# EAGLE board board (EAGLE 9.7.0)
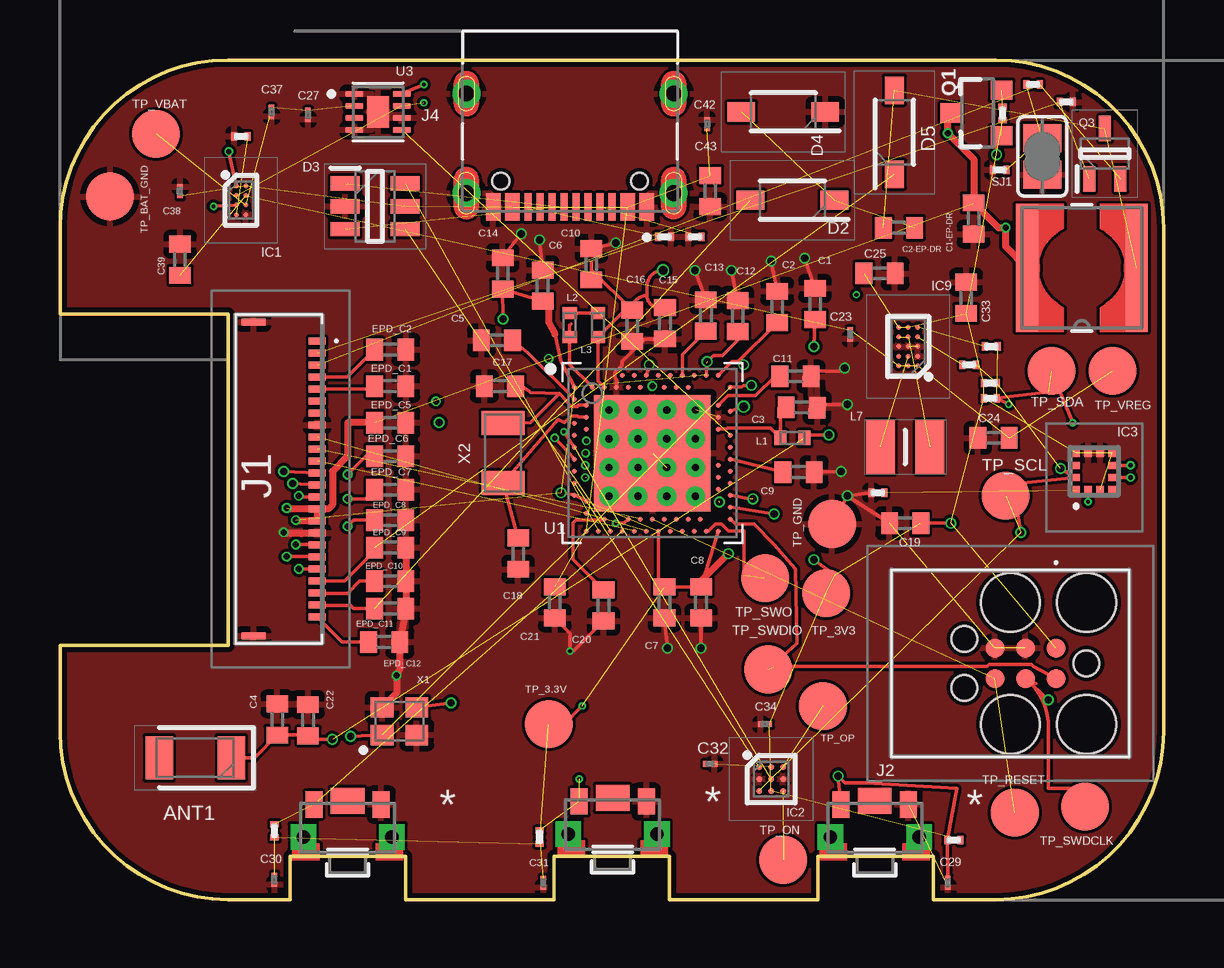
[diagram p0: board, top side]
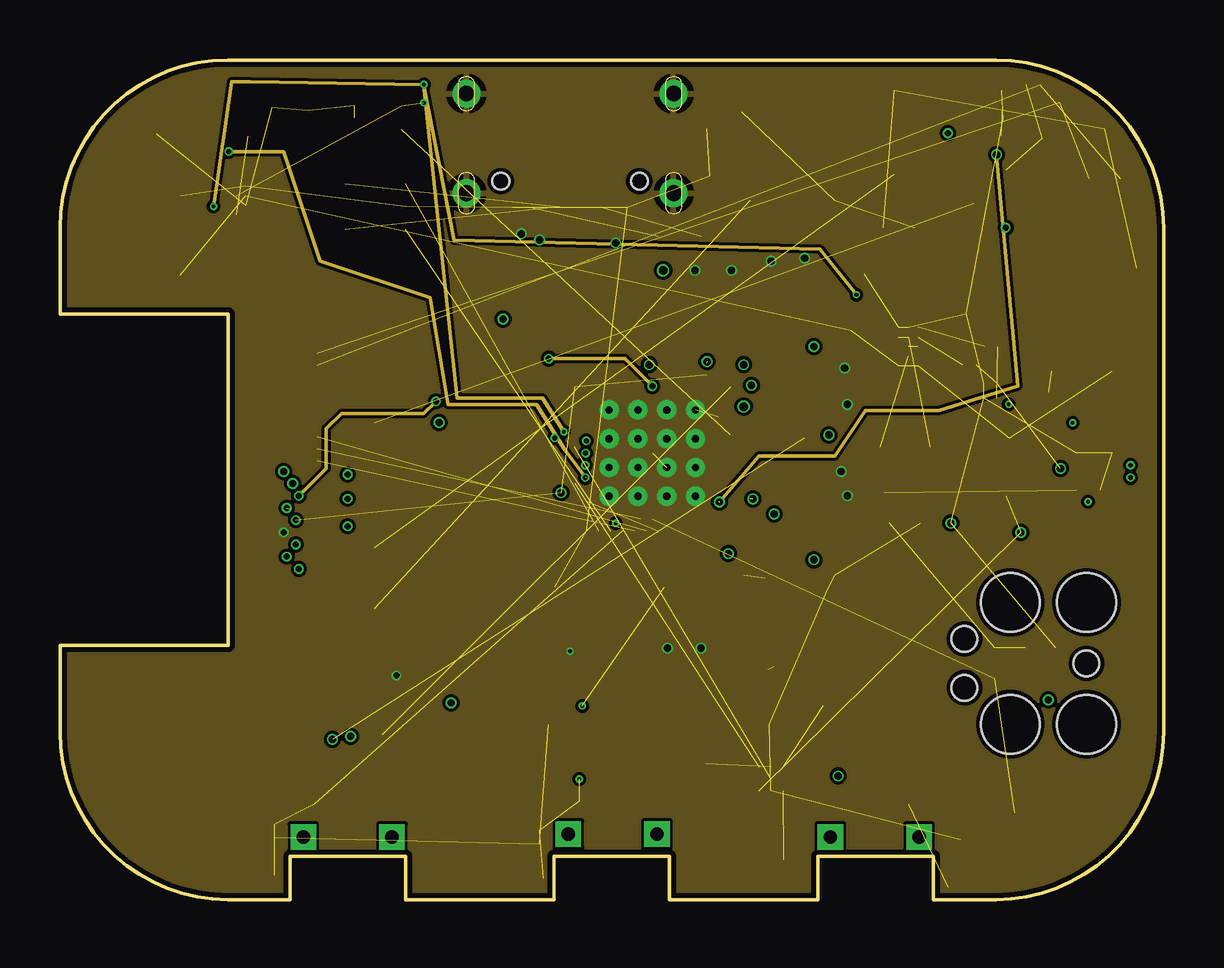
[diagram p1: board, inner layer Route2]
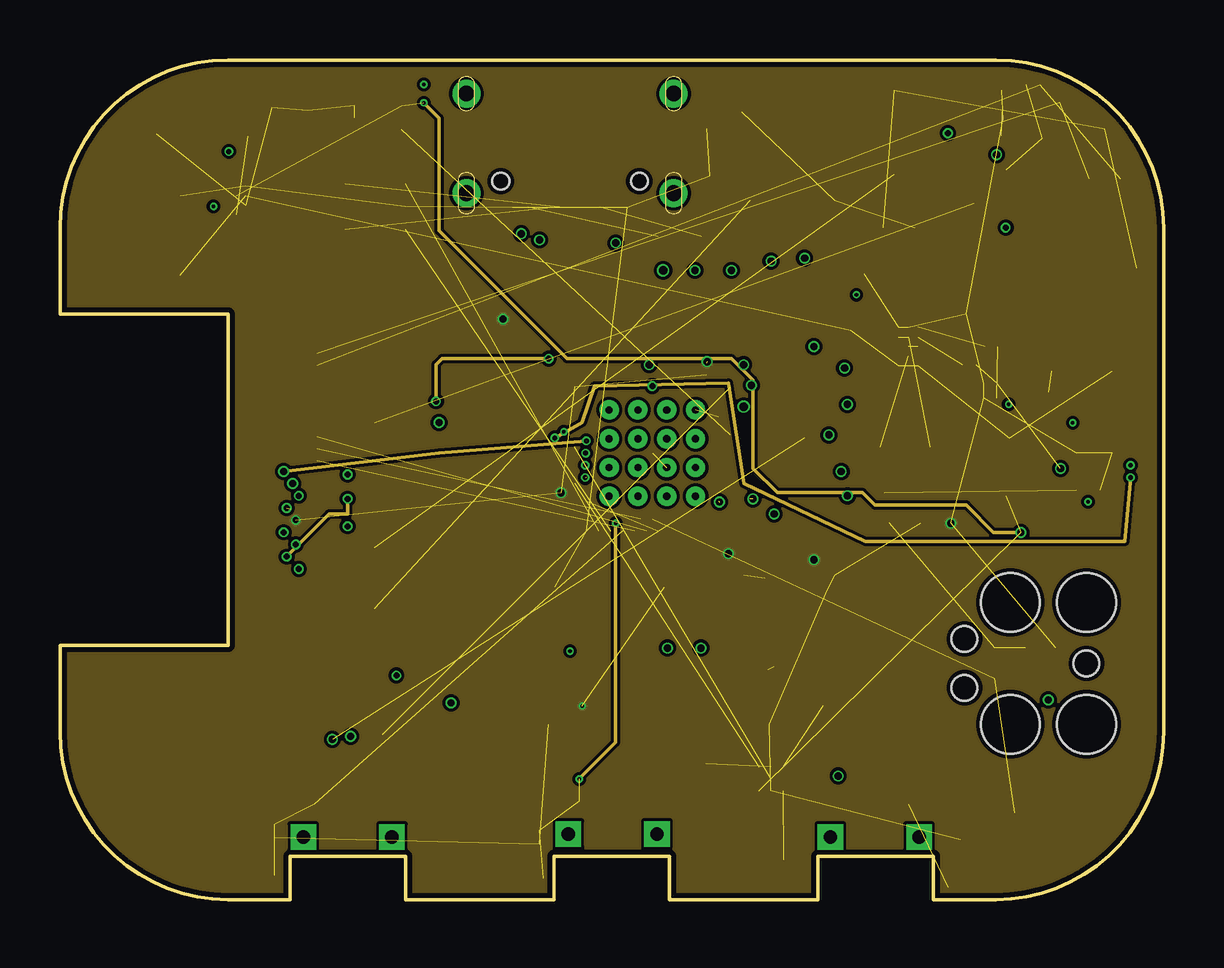
[diagram p2: board, inner layer Route15]
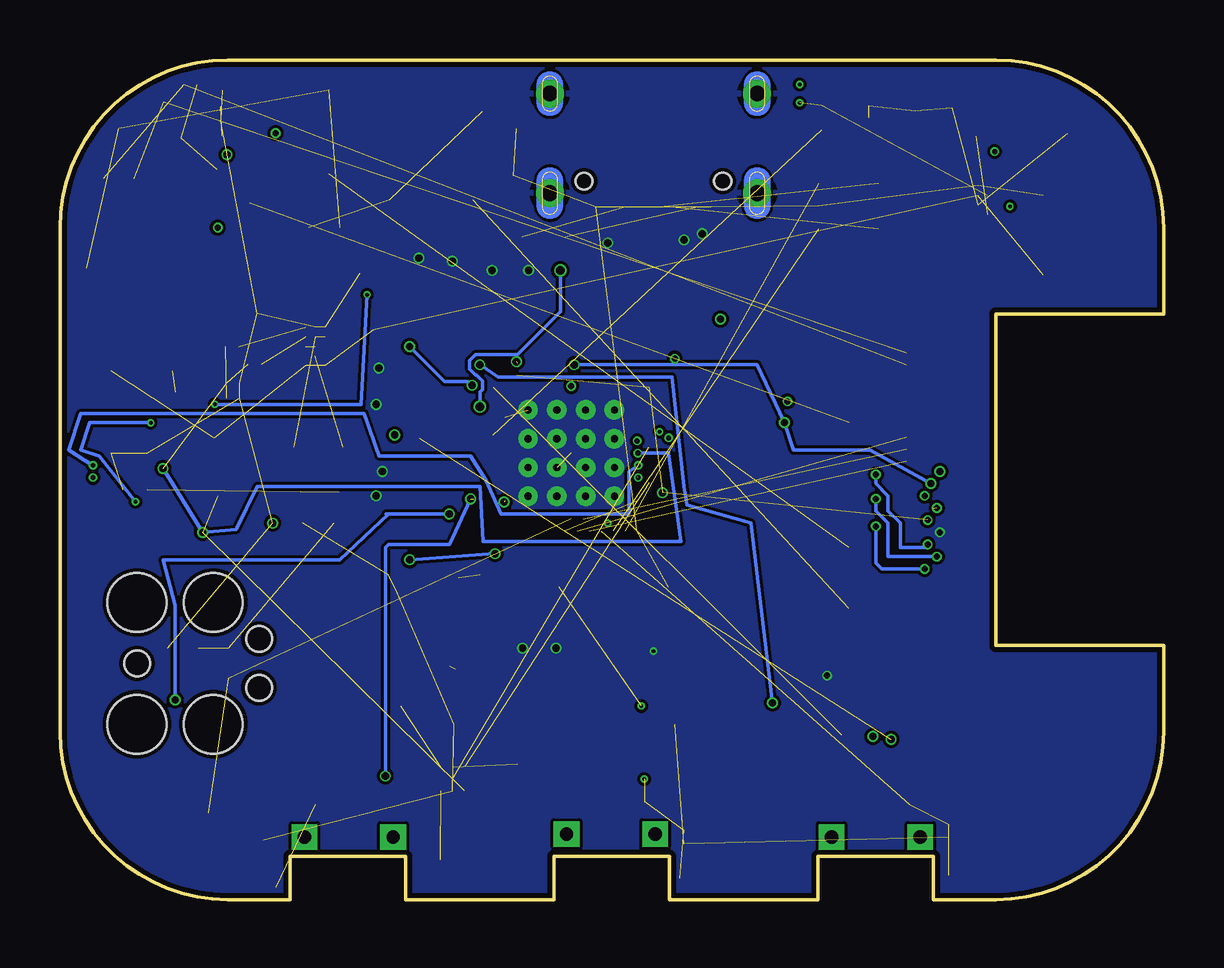
[diagram p3: board, bottom side, seen from below]

Size 46 x 35 mm. Coordinates in mm from the lower left corner, seen from the top.
Outline: 39,0 36.4,0 36.4,1.8 31.6,1.8 31.6,0 25.4,0 25.4,1.8 20.6,1.8 20.6,0 14.4,0 14.4,1.8 9.6,1.8 9.6,0 7,0 arc-90 0,7 0,10.6 7,10.6 7,24.4 0,24.4 0,28 arc-90 7,35 39,35 arc-90 46,28 46,7 arc-90 39,0
Copper layers (1*16): Top 0.035mm / dielectric 1.6mm / Bottom 0.035mm
Design rules "jlcpcb-2layers.dru": minimum track width 5mil, minimum drill 0.3mm, track to track 5mil, track to pad 5mil, pad to pad 5mil, via to via 5mil, smd to smd 5mil, copper to edge 0.2mm, drill to drill 6mil, minimum pad ring 10mil, minimum via ring 3mil, stop-mask expansion 4mil, vias tented up to drill 0mil, thermal gap 10mil

## Footprints (pad centres in the part's own frame; a part is rotated, then mirrored left to right if it is on the bottom)
2450AT18B100E_ANTC3216X140N = smd 1.15 x 1.8: 1 -1.5,0; 2 1.5,0
ESP32_C6_LIBRARY_1_ESP32_WROVER_EAGLE-LTSPICE_C0402 = smd 0.7 x 0.9: 1 -0.65,0; 2 0.65,0
GRM011R60J152KE01L_2_CAPC0201X13N = smd 0.22 x 0.23: 1 -0.185,0; 2 0.185,0
ESP32_C6_LIBRARY_5_SOD3716X135N = smd 1.15 x 0.8: 1 -1.75,0; 2 1.75,0
ESP32_C6_LIBRARY_3_SOT95P280X145-6N = smd 1.2 x 0.6: 1 -1.25,0.95; 2 -1.25,0; 3 -1.25,-0.95; 4 1.25,-0.95; 5 1.25,0; 6 1.25,0.95
BQ25180YBGR_BGA8C40P2X4_100X155X50 = smd 0.2 x 0.2: A1 -0.2,0.6; A2 0.2,0.6; B1 -0.2,0.2; B2 0.2,0.2; C1 -0.2,-0.2; C2 0.2,-0.2; D1 -0.2,-0.6; D2 0.2,-0.6
DRV2605YZFR_BGA9C50P3X3_144X144X62 = smd 0.25 x 0.25: A1 -0.5,0.5; A2 0,0.5; A3 0.5,0.5; B1 -0.5,0; B2 0,0; B3 0.5,0; C1 -0.5,-0.5; C2 0,-0.5; C3 0.5,-0.5
BMA423_BMA423 = smd 0.3 x 0.35: 1 -0.75,-0.775; 2 -0.25,-0.775; 3 0.25,-0.775; 4 0.75,-0.775; 7 0.75,0.775; 8 0.25,0.775; 9 -0.25,0.775; 10 -0.75,0.775 | smd 0.35 x 0.3: 5 0.775,-0.25; 6 0.775,0.25; 11 -0.775,0.25; 12 -0.775,-0.25
RT6160AWSC_BGA15C40P3X5_140X230X60 = smd 0.216 x 0.216: A1 -0.4,0.8; A2 0,0.8; A3 0.4,0.8; B1 -0.4,0.4; B2 0,0.4; B3 0.4,0.4; C1 -0.4,0; C2 0,0; C3 0.4,0; D1 -0.4,-0.4; D2 0,-0.4; D3 0.4,-0.4; E1 -0.4,-0.8; E2 0,-0.8; E3 0.4,-0.8
503480-2400_5034802400 = smd 0.3 x 0.7: 1 -5.75,1.525; 2 -5.25,1.525; 3 -4.75,1.525; 4 -4.25,1.525; 5 -3.75,1.525; 6 -3.25,1.525; 7 -2.75,1.525; 8 -2.25,1.525; 9 -1.75,1.525; 10 -1.25,1.525; 11 -0.75,1.525; 12 -0.25,1.525; 13 0.25,1.525; 14 0.75,1.525; 15 1.25,1.525; 16 1.75,1.525; 17 2.25,1.525; 18 2.75,1.525; 19 3.25,1.525; 20 3.75,1.525; 21 4.25,1.525; 22 4.75,1.525; 23 5.25,1.525; 24 5.75,1.525 | smd 0.3 x 1: MP1 -6.54,-1.125; MP2 6.54,-1.125
TC2030-IDC_TC2030IDC = smd 0.783 x 0.783: 1 -0.953,-0.635; 2 -0.953,0.635; 3 0.317,-0.635; 4 0.317,0.635; 5 1.588,-0.635; 6 1.588,0.635 | hole 2.451: -2.223,-2.54; -2.223,2.54; 0.952,-2.54; 0.952,2.54 | hole 1.067: -2.223,0; 2.857,-1.016; 2.857,1.016
KH-TYPE-C-16P_KINGHELM_KH-TYPE-C-16P = smd 0.6 x 1.15: A1_B12 -3.2,4.725; A4_B9 -2.4,4.725; A9_B4 2.4,4.725; A12_B1 3.2,4.725 | smd 0.3 x 1.15: A5 -1.25,4.725; A6 -0.25,4.725; A7 0.25,4.725; A8 1.25,4.725; B5 1.75,4.725; B6 0.75,4.725; B7 -0.75,4.725; B8 -1.75,4.725 | drill 0.65 pad 1.05: SH1 -4.32,0; SH2 4.32,0; SH3 -4.32,4.15; SH4 4.32,4.15 | hole 0.7: -2.89,3.65; 2.89,3.65
NORDIC_NRF_2_RESC0402_L = smd 0.5 x 0.6: 1 -0.5,0; 2 0.5,0
ESP32_C6_LIBRARY_2_IND_4828-WE-TPC_WRE = smd 0.9 x 5.3: 1 -2.286,0; 2 2.286,0
MLP2016SR47MT0S1_INDC2016X100N = smd 1.2 x 2.2: 1 -1.028,0; 2 1.028,0
ESP32_C6_LIBRARY_4_ESP32_C6_LIBRARY_4_ESP32_C6_LIBRARY_4_ESP32_C6_LIBRARY_4_ESP32_WROVER_SPARKFUN-DISCRETESEMI_SOT23-3 = smd 0.8 x 0.9: 1 -0.95,-1; 2 0.95,-1; 3 0,1.1
ESP32_C6_LIBRARY_6_SOT65P210X110-3N = smd 1.05 x 0.5: 1 -1.05,0.65; 2 -1.05,-0.65; 3 1.05,0
ERA-1AEB3401C_0201 = smd 0.35 x 0.25: 1 0,0.275; 2 0,-0.275
ESP32_C6_LIBRARY_7_JUMPER_SJ = smd 1.168 x 1.6: 1 -0.762,0; 2 0.762,0
2025-10-22_07-23-44_LIBRARY_SW_EVP-AKE31A_PAN = smd 0.711 x 1.092: 1 -1.4,-0.972; 2 1.4,-0.972 | drill 0.559 pad 0.914 square: 3 -1.848,0.381; 4 1.848,0.381 | smd 1.397 x 1.092: 5 0,-1.124
HECTOR_WATCH_1_TP20R = smd 2 x 2: TP 0,0
NORDIC_NRF_4_AQFN50P700X700X85_HS-74N = smd 4.85 x 4.85: P$74 0,0 | drill 0.3 pad 0.6: P$75 -1.8,1.8; P$76 -0.6,1.8; P$77 0.6,1.8; P$78 1.8,1.8; P$79 -1.8,0.6; P$80 -0.6,0.6; P$81 0.6,0.6; P$82 1.8,0.6; P$83 -1.8,-0.6; P$84 -0.6,-0.6; P$85 0.6,-0.6; P$86 1.8,-0.6; P$87 -1.8,-1.8; P$88 -0.6,-1.8; P$89 0.6,-1.8; P$90 1.8,-1.8 | smd 0.2 x 0.2: P$A8 -1.25,3.25; P$A10 -0.75,3.25; P$A12 -0.25,3.25; P$A14 0.25,3.25; P$A16 0.75,3.25; P$A18 1.25,3.25; P$A20 1.75,3.25; P$A22 2.25,3.25; P$A23 2.75,3.25; P$AA24 3.25,-2.25; P$AB2 -2.75,-2.5; P$AC5 -2,-2.75; P$AC9 -1,-2.75; P$AC11 -0.5,-2.75; P$AC13 0,-2.75; P$AC15 0.5,-2.75; P$AC17 1,-2.75; P$AC19 1.5,-2.75; P$AC21 2,-2.75; P$AC24 3.25,-2.75; P$AD2 -2.75,-3.25; P$AD4 -2.25,-3.25; P$AD6 -1.75,-3.25; P$AD8 -1.25,-3.25; P$AD10 -0.75,-3.25; P$AD12 -0.25,-3.25; P$AD14 0.25,-3.25; P$AD16 0.75,-3.25; P$AD18 1.25,-3.25; P$AD20 1.75,-3.25; P$AD22 2.25,-3.25; P$AD23 2.75,-3.25; P$B1 -3.25,2.75; P$B3 -2.5,2.75; P$B5 -2,2.75; P$B7 -1.5,2.75; P$B9 -1,2.75; P$B11 -0.5,2.75; P$B13 0,2.75; P$B15 0.5,2.75; P$B17 1,2.75; P$B19 1.5,2.75; P$B24 3.25,2.75; P$C1 -3.25,2.25; P$D2 -2.75,2; P$D23 2.75,2; P$E24 3.25,1.75; P$F2 -2.75,1.5; P$F23 2.75,1.5; P$G1 -3.25,1.25; P$H2 -2.75,1; P$H23 2.75,1; P$J1 -3.25,0.75; P$J24 3.25,0.75; P$K2 -2.75,0.5; P$L1 -3.25,0.25; P$L24 3.25,0.25; P$M2 -2.75,0; P$N1 -3.25,-0.25; P$N24 3.25,-0.25; P$P2 -2.75,-0.5; P$P23 2.75,-0.5; P$R1 -3.25,-0.75; P$R24 3.25,-0.75; P$T2 -2.75,-1; P$T23 2.75,-1; P$U1 -3.25,-1.25; P$U24 3.25,-1.25; P$V23 2.75,-1.5; P$W1 -3.25,-1.75; P$W24 3.25,-1.75; P$Y2 -2.75,-2; P$Y23 2.75,-2
ESP32_C6_LIBRARY_SON50P200X200X80-9N = smd 0.76 x 0.27: 1 -0.985,0.75; 2 -0.985,0.25; 3 -0.985,-0.25; 4 -0.985,-0.75; 5 0.985,-0.75; 6 0.985,-0.25; 7 0.985,0.25; 8 0.985,0.75 | smd 0.9 x 1.3: 9 0,0
NORDIC_NRF_BT-XTAL_2016_N = smd 0.95 x 0.85: 1 -0.725,-0.575; 2 0.725,-0.575; 3 0.725,0.575; 4 -0.725,0.575
NORDIC_NRF_1_XTAL_3215_N = smd 1 x 1.8: 1 -1.25,0; 2 1.25,0

## Placement (x,y rotation side)
ANT1  2450AT18B100E  [2450AT18B100E_ANTC3216X140N]  5.64,5.91 180 top
C1  12pF  [ESP32_C6_LIBRARY_1_ESP32_WROVER_EAGLE-LTSPICE_C0402]  31.47,24.83 270 top
C1-EP-DR  10uF  [ESP32_C6_LIBRARY_1_ESP32_WROVER_EAGLE-LTSPICE_C0402]  38.09,28.39 90 top
C2  12pF  [ESP32_C6_LIBRARY_1_ESP32_WROVER_EAGLE-LTSPICE_C0402]  29.9,24.71 90 top
C2-EP-DR  4.7uF/25V  [ESP32_C6_LIBRARY_1_ESP32_WROVER_EAGLE-LTSPICE_C0402]  34.98,28.01 0 top
C3  1pF  [ESP32_C6_LIBRARY_1_ESP32_WROVER_EAGLE-LTSPICE_C0402]  30.91,20.52 179.1 top
C4  1pF  [ESP32_C6_LIBRARY_1_ESP32_WROVER_EAGLE-LTSPICE_C0402]  9.06,7.51 270 top
C5  100nF  [ESP32_C6_LIBRARY_1_ESP32_WROVER_EAGLE-LTSPICE_C0402]  18.21,23.31 0 top
C6  4.7uF  [ESP32_C6_LIBRARY_1_ESP32_WROVER_EAGLE-LTSPICE_C0402]  20.12,25.59 270 top
C7  100nF  [ESP32_C6_LIBRARY_1_ESP32_WROVER_EAGLE-LTSPICE_C0402]  25.2,12.39 90 top
C8  100nF  [ESP32_C6_LIBRARY_1_ESP32_WROVER_EAGLE-LTSPICE_C0402]  26.72,12.39 90 top
C9  820pF  [ESP32_C6_LIBRARY_1_ESP32_WROVER_EAGLE-LTSPICE_C0402]  30.79,17.82 180 top
C10  N.C.  [ESP32_C6_LIBRARY_1_ESP32_WROVER_EAGLE-LTSPICE_C0402]  22.15,26.48 270 top
C11  100pF  [ESP32_C6_LIBRARY_1_ESP32_WROVER_EAGLE-LTSPICE_C0402]  30.66,21.81 179.8 top
C12  100nF  [ESP32_C6_LIBRARY_1_ESP32_WROVER_EAGLE-LTSPICE_C0402]  28.25,24.32 90 top
C13  N.C.  [ESP32_C6_LIBRARY_1_ESP32_WROVER_EAGLE-LTSPICE_C0402]  26.92,24.35 90 top
C14  4.7uF  [ESP32_C6_LIBRARY_1_ESP32_WROVER_EAGLE-LTSPICE_C0402]  18.46,26.1 270 top
C15  1.0uF  [ESP32_C6_LIBRARY_1_ESP32_WROVER_EAGLE-LTSPICE_C0402]  25.22,24.02 270 top
C16  47nF  [ESP32_C6_LIBRARY_1_ESP32_WROVER_EAGLE-LTSPICE_C0402]  23.85,23.92 270 top
C17  12pF  [ESP32_C6_LIBRARY_1_ESP32_WROVER_EAGLE-LTSPICE_C0402]  18.34,21.4 180 top
C18  12pF  [ESP32_C6_LIBRARY_1_ESP32_WROVER_EAGLE-LTSPICE_C0402]  19.1,14.42 270 top
C19  100nF  [ESP32_C6_LIBRARY_1_ESP32_WROVER_EAGLE-LTSPICE_C0402]  35.23,15.69 180 top
C20  4.7uF  [ESP32_C6_LIBRARY_1_ESP32_WROVER_EAGLE-LTSPICE_C0402]  22.66,12.26 90 top
C21  4.7uF  [ESP32_C6_LIBRARY_1_ESP32_WROVER_EAGLE-LTSPICE_C0402]  20.63,12.39 90 top
C22  N.C.  [ESP32_C6_LIBRARY_1_ESP32_WROVER_EAGLE-LTSPICE_C0402]  10.34,7.48 270 top
C23  0.1uF  [GRM011R60J152KE01L_2_CAPC0201X13N]  32.95,23.56 270 top
C24  10uF  [ESP32_C6_LIBRARY_1_ESP32_WROVER_EAGLE-LTSPICE_C0402]  38.91,19.25 0 top
C25  22uF  [ESP32_C6_LIBRARY_1_ESP32_WROVER_EAGLE-LTSPICE_C0402]  34.16,26.1 0 top
C27  0.1uF  [GRM011R60J152KE01L_2_CAPC0201X13N]  10.34,32.71 90 top
C29  1uF  [GRM011R60J152KE01L_2_CAPC0201X13N]  37.01,0.7 270 top
C30  1uF  [GRM011R60J152KE01L_2_CAPC0201X13N]  8.94,0.83 270 top
C31  1uF  [GRM011R60J152KE01L_2_CAPC0201X13N]  20.16,0.7 270 top
C32  1uF  [GRM011R60J152KE01L_2_CAPC0201X13N]  27.1,5.66 0 top
C33  22uF  [ESP32_C6_LIBRARY_1_ESP32_WROVER_EAGLE-LTSPICE_C0402]  37.77,25.09 90 top
C34  0.1uF  [GRM011R60J152KE01L_2_CAPC0201X13N]  29.39,7.31 0 top
C37  1uF  [GRM011R60J152KE01L_2_CAPC0201X13N]  8.82,32.83 90 top
C38  1uF  [GRM011R60J152KE01L_2_CAPC0201X13N]  5.01,29.53 270 top
C39  10uF  [ESP32_C6_LIBRARY_1_ESP32_WROVER_EAGLE-LTSPICE_C0402]  5.01,26.67 90 top
C42  0.1uF  [GRM011R60J152KE01L_2_CAPC0201X13N]  26.98,32.33 90 top
C43  4.7uF  [ESP32_C6_LIBRARY_1_ESP32_WROVER_EAGLE-LTSPICE_C0402]  27.1,29.53 90 top
D2  MBR0530  [ESP32_C6_LIBRARY_5_SOD3716X135N]  30.53,29.15 180 top
D3  USBLC6-2SC6Y  [ESP32_C6_LIBRARY_3_SOT95P280X145-6N]  13.13,28.9 0 top
D4  MBR0530  [ESP32_C6_LIBRARY_5_SOD3716X135N]  30.15,32.83 180 top
D5  MBR0530  [ESP32_C6_LIBRARY_5_SOD3716X135N]  34.78,31.98 90 top
EPD_C1  1uF/50V  [ESP32_C6_LIBRARY_1_ESP32_WROVER_EAGLE-LTSPICE_C0402]  13.77,21.4 180 top
EPD_C2  1uF/50V  [ESP32_C6_LIBRARY_1_ESP32_WROVER_EAGLE-LTSPICE_C0402]  13.77,22.93 180 top
EPD_C5  0.1uF/50V  [ESP32_C6_LIBRARY_1_ESP32_WROVER_EAGLE-LTSPICE_C0402]  13.77,19.88 180 top
EPD_C6  1uF/50V  [ESP32_C6_LIBRARY_1_ESP32_WROVER_EAGLE-LTSPICE_C0402]  13.77,18.48 180 top
EPD_C7  1uF/50V  [ESP32_C6_LIBRARY_1_ESP32_WROVER_EAGLE-LTSPICE_C0402]  13.77,17.09 180 top
EPD_C8  1uF/50V  [ESP32_C6_LIBRARY_1_ESP32_WROVER_EAGLE-LTSPICE_C0402]  13.77,15.82 180 top
EPD_C9  1uF/50V  [ESP32_C6_LIBRARY_1_ESP32_WROVER_EAGLE-LTSPICE_C0402]  13.77,14.67 180 top
EPD_C10  1uF/50V  [ESP32_C6_LIBRARY_1_ESP32_WROVER_EAGLE-LTSPICE_C0402]  13.77,13.28 180 top
EPD_C11  1uF/50V  [ESP32_C6_LIBRARY_1_ESP32_WROVER_EAGLE-LTSPICE_C0402]  13.77,12.13 180 top
EPD_C12  1uF/50V  [ESP32_C6_LIBRARY_1_ESP32_WROVER_EAGLE-LTSPICE_C0402]  13.51,10.74 180 top
IC1  BQ25180YBGR  [BQ25180YBGR_BGA8C40P2X4_100X155X50]  7.55,29.15 0 top
IC2  DRV2605YZFR  [DRV2605YZFR_BGA9C50P3X3_144X144X62]  29.64,5.02 0 top
IC3  BMA421  [BMA423_BMA423]  43.11,17.85 0 top
IC9  RT6160AWSC  [RT6160AWSC_BGA15C40P3X5_140X230X60]  35.36,23.05 180 top
J1  503480-2400  [503480-2400_5034802400]  9.2,17.53 270 top
J2  TC2030-IDC  [TC2030-IDC_TC2030IDC]  40.56,9.85 180 top
J4  KH-TYPE-C-16P  [KH-TYPE-C-16P_KINGHELM_KH-TYPE-C-16P]  21.26,33.6 180 top
L1  3.9nH  [NORDIC_NRF_2_RESC0402_L]  30.53,19.25 180 top
L2  10uH  [NORDIC_NRF_2_RESC0402_L]  21.25,23.94 270 top
L3  15nH  [NORDIC_NRF_2_RESC0402_L]  22.43,23.94 90 top
L5  68uH  [ESP32_C6_LIBRARY_2_IND_4828-WE-TPC_WRE]  42.6,26.33 180 top
L7  FTC252012SR47MBCA  [MLP2016SR47MT0S1_INDC2016X100N]  35.23,18.86 0 top
Q1  DMG2305UX-7  [ESP32_C6_LIBRARY_4_ESP32_C6_LIBRARY_4_ESP32_C6_LIBRARY_4_ESP32_C6_LIBRARY_4_ESP32_WROVER_SPARKFUN-DISCRETESEMI_SOT23-3]  38.25,32.79 90 top
Q3  SI1308EDL-T1-GE3  [ESP32_C6_LIBRARY_6_SOT65P210X110-3N]  43.55,31.09 90 top
R1_EP_DR  0.47  [ERA-1AEB3401C_0201]  40.56,33.98 90 top
R1_USB  5K1  [ERA-1AEB3401C_0201]  26.47,27.63 90 top
R2  0  [ERA-1AEB3401C_0201]  38.82,23.05 270 top
R2_EP_DR  10K  [ERA-1AEB3401C_0201]  41.95,33.25 270 top
R2_USB1  5K1  [ERA-1AEB3401C_0201]  25.2,27.63 90 top
R3  0  [ERA-1AEB3401C_0201]  34.09,16.96 90 top
R4  0  [ERA-1AEB3401C_0201]  37.9,22.29 270 top
R5  10K  [ERA-1AEB3401C_0201]  8.94,2.86 0 top
R7  10K  [ERA-1AEB3401C_0201]  37.26,2.48 90 top
R8  10K  [ERA-1AEB3401C_0201]  19.99,2.61 0 top
R9  10K  [ERA-1AEB3401C_0201]  7.55,31.82 90 top
R17  3K3  [ERA-1AEB3401C_0201]  38.79,21.53 90 top
R18  3K3  [ERA-1AEB3401C_0201]  38.79,20.9 90 top
R_PWR_EPD  10K  [ERA-1AEB3401C_0201]  39.3,32.77 0 top
R_TYPE_SEL  2.2  [ERA-1AEB3401C_0201]  39.17,30.42 90 top
SJ1  [ESP32_C6_LIBRARY_7_JUMPER_SJ]  40.95,30.98 90 top
SW_DN  2025-10-22_07-23-44_LIBRARY_EVP-AKE31ASW_EVP-AKE31A_PAN  [2025-10-22_07-23-44_LIBRARY_SW_EVP-AKE31A_PAN]  33.96,2.99 180 top
SW_ENT  2025-10-22_07-23-44_LIBRARY_EVP-AKE31ASW_EVP-AKE31A_PAN  [2025-10-22_07-23-44_LIBRARY_SW_EVP-AKE31A_PAN]  23.04,3.12 180 top
SW_UP  2025-10-22_07-23-44_LIBRARY_EVP-AKE31ASW_EVP-AKE31A_PAN  [2025-10-22_07-23-44_LIBRARY_SW_EVP-AKE31A_PAN]  11.99,2.99 180 top
TP_3.3V  HECTOR_WATCH_1_TPTP20R  [HECTOR_WATCH_1_TP20R]  20.37,7.31 0 top
TP_3V3  HECTOR_WATCH_1_TPTP20R  [HECTOR_WATCH_1_TP20R]  31.93,12.77 0 top
TP_BAT_GND  HECTOR_WATCH_1_TPTP20R  [HECTOR_WATCH_1_TP20R]  2.08,29.31 0 top
TP_GND  HECTOR_WATCH_1_TPTP20R  [HECTOR_WATCH_1_TP20R]  32.18,15.66 0 top
TP_ON  HECTOR_WATCH_1_TPTP20R  [HECTOR_WATCH_1_TP20R]  30.15,1.66 0 top
TP_OP  HECTOR_WATCH_1_TPTP20R  [HECTOR_WATCH_1_TP20R]  31.8,8.07 0 top
TP_RESET  HECTOR_WATCH_1_TPTP20R  [HECTOR_WATCH_1_TP20R]  39.8,3.62 0 top
TP_SCL  HECTOR_WATCH_1_TPTP20R  [HECTOR_WATCH_1_TP20R]  39.42,16.83 0 top
TP_SDA  HECTOR_WATCH_1_TPTP20R  [HECTOR_WATCH_1_TP20R]  41.33,22.04 0 top
TP_SWDCLK  HECTOR_WATCH_1_TPTP20R  [HECTOR_WATCH_1_TP20R]  42.72,3.88 0 top
TP_SWDIO  HECTOR_WATCH_1_TPTP20R  [HECTOR_WATCH_1_TP20R]  29.52,9.59 0 top
TP_SWO  HECTOR_WATCH_1_TPTP20R  [HECTOR_WATCH_1_TP20R]  29.39,13.4 0 top
TP_VBAT  HECTOR_WATCH_1_TPTP20R  [HECTOR_WATCH_1_TP20R]  4,31.92 0 top
TP_VREG  HECTOR_WATCH_1_TPTP20R  [HECTOR_WATCH_1_TP20R]  43.87,22.04 0 top
U1  NRF52840_QF  [NORDIC_NRF_4_AQFN50P700X700X85_HS-74N]  24.69,18.61 0 top
U3  MAX17048G+T10  [ESP32_C6_LIBRARY_SON50P200X200X80-9N]  13.26,32.83 0 top
X1  32MHz  [NORDIC_NRF_BT-XTAL_2016_N]  14.15,7.43 0 top
X2  32.768kHz  [NORDIC_NRF_1_XTAL_3215_N]  18.47,18.61 270 top

## Library data of the parts
ANT1 = InkTime_v5; ARROW_PART_NUMBER: 2450AT18B100E; ARROW_PRICE-STOCK: https://www.arrow.com/en/products/2450at18b100e/johanson-dielectrics?utm_currency=USD&region=nac; DESCRIPTION: Antennas 2.45GHz ANTENNA; HEIGHT: 1.4mm; MANUFACTURER_NAME: JOHANSON TECHNOLOGY; MANUFACTURER_PART_NUMBER: 2450AT18B100E; MOUSER_PART_NUMBER: 609-2450AT18B100E; MOUSER_PRICE-STOCK: https://www.mouser.co.uk/ProductDetail/Johanson-Technology/2450AT18B100E?qs=yCnrNFeXz%252Bh5MFsFIXGZGA%3D%3D
C1 C1-EP-DR C2 C2-EP-DR C3-C22 C24 C25 C33 C39 C43 EPD_C1 EPD_C2 EPD_C5-EPD_C12 = InkTime_v5; SPICEMODEL: NONE; SPICEPREFIX: C
C23 C27 C29-C32 C34 C37 C38 C42 = InkTime_v5; AVAILABILITY: In Stock; CHECK_PRICES: https://www.snapeda.com/parts/GRM011R60J152KE01L/Murata/view-part/?ref=eda; DESCRIPTION: SMD Capacitor X5R(EIA) with Capacitance: 1500pF Tol. 10%. Rated Voltage: 6.3Vdc; MF: Murata; MP: GRM011R60J152KE01L; PACKAGE: 0201 Murata; PRICE: None; SNAPEDA_LINK: https://www.snapeda.com/parts/GRM011R60J152KE01L/Murata/view-part/?ref=snap
D2 D4 D5 = InkTime_v5; AVAILABILITY: In Stock; CHECK_PRICES: https://www.snapeda.com/parts/MBR0530/Onsemi/view-part/?ref=eda; DESCRIPTION: Diode Schottky 30 V 500mA Surface Mount SOD-123; MF: ON Semiconductor; MP: MBR0530; PACKAGE: SOD-123-2 ON Semiconductor; PRICE: None; PURCHASE-URL: https://www.snapeda.com/api/url_track_click_mouser/?unipart_id=179458&manufacturer=ON Semiconductor&part_name=MBR0530&search_term=None; SNAPEDA_LINK: https://www.snapeda.com/parts/MBR0530/Onsemi/view-part/?ref=snap
D3 = InkTime_v5; AVAILABILITY: In Stock; CHECK_PRICES: https://www.snapeda.com/parts/USBLC6-2SC6Y/STMicroelectronics/view-part/?ref=eda; DESCRIPTION: 17V Clamp 5A (8/20µs) Ipp Tvs Diode Surface Mount SOT-23-6; MF: STMicroelectronics; MP: USBLC6-2SC6Y; PACKAGE: SOT-23-6 STMicroelectronics; PRICE: None; SNAPEDA_LINK: https://www.snapeda.com/parts/USBLC6-2SC6Y/STMicroelectronics/view-part/?ref=snap
IC1 = InkTime_v5; ARROW_PART_NUMBER: BQ25180YBGR; ARROW_PRICE-STOCK: https://www.arrow.com/en/products/bq25180ybgr/texas-instruments?utm_currency=USD&region=nac; DESCRIPTION: Charger IC Lithium Ion/Polymer, Lithium Iron Phosphate 8-DSBGA (1.6x1.1); HEIGHT: 0.5mm; MANUFACTURER_NAME: Texas Instruments; MANUFACTURER_PART_NUMBER: BQ25180YBGR; MOUSER_PART_NUMBER: 595-BQ25180YBGR; MOUSER_PRICE-STOCK: https://www.mouser.co.uk/ProductDetail/Texas-Instruments/BQ25180YBGR?qs=doiCPypUmgEWjAK%252BJAX6Tw%3D%3D
IC2 = InkTime_v5; ARROW_PART_NUMBER: DRV2605YZFR; ARROW_PRICE-STOCK: https://www.arrow.com/en/products/drv2605yzfr/texas-instruments?region=nac; DESCRIPTION: Haptic Driver for ERM/LRA with Built-In Library and Smart Loop Architecture; HEIGHT: 0.625mm; MANUFACTURER_NAME: Texas Instruments; MANUFACTURER_PART_NUMBER: DRV2605YZFR
IC3 = InkTime_v5; ARROW_PART_NUMBER: BMA423; ARROW_PRICE-STOCK: https://www.arrow.com/en/products/bma423/bosch; DESCRIPTION: Accelerometers Triaxial low-g 12bit Acceleration Sensor; HEIGHT: 1mm; MANUFACTURER_NAME: BOSCH; MANUFACTURER_PART_NUMBER: BMA423; MOUSER_PART_NUMBER: 262-BMA423; MOUSER_PRICE-STOCK: https://www.mouser.co.uk/ProductDetail/Bosch-Sensortec/BMA423?qs=HXFqYaX1Q2xC%252BSgeGoX3mg%3D%3D
IC9 = InkTime_v5; DESCRIPTION: Buck-Boost Regulator Positive Output Step-Up/Step-Down I2C DC-DC Controller IC 15-WL-CSP (BSC) (1.4x2.3); HEIGHT: 0.6mm; MANUFACTURER_NAME: RICHTEK; MANUFACTURER_PART_NUMBER: RT6160AWSC; MOUSER_PART_NUMBER: 835-RT6160AWSC; MOUSER_PRICE-STOCK: https://www.mouser.co.uk/ProductDetail/Richtek/RT6160AWSC?qs=amGC7iS6iy%2FLd9PSoixZXQ%3D%3D
J1 = InkTime_v5; DESCRIPTION: FFC & FPC Connectors 0.5mm FPC RA SMT Dual Contact 24Ckt; HEIGHT: 1.87mm; MANUFACTURER_NAME: Molex; MANUFACTURER_PART_NUMBER: 503480-2400; MOUSER_PART_NUMBER: 538-503480-2400; MOUSER_PRICE-STOCK: https://www.mouser.co.uk/ProductDetail/Molex/503480-2400?qs=OAhjpuo3Vu7efIoxFh9AOw%3D%3D
J2 = InkTime_v5; DESCRIPTION: CABLE ADAPTER 6 POS; HEIGHT: 19mm; MANUFACTURER_NAME: Tag Connect; MANUFACTURER_PART_NUMBER: TC2030-IDC
J4 = InkTime_v5; AVAILABILITY: Not in stock; CHECK_PRICES: https://www.snapeda.com/parts/KH-TYPE-C-16P/Kinghelm/view-part/?ref=eda; MF: kinghelm; MP: KH-TYPE-C-16P; PACKAGE: None; PRICE: None; SNAPEDA_LINK: https://www.snapeda.com/parts/KH-TYPE-C-16P/Kinghelm/view-part/?ref=snap
L1-L3 R1_EP_DR R1_USB R2 R2_EP_DR R2_USB1 R3-R5 R7-R9 R17 R18 R_PWR_EPD R_TYPE_SEL SJ1 TP_3.3V TP_3V3 TP_BAT_GND TP_GND TP_ON TP_OP TP_RESET TP_SCL TP_SDA TP_SWDCLK TP_SWDIO TP_SWO TP_VBAT TP_VREG U1 X1 X2 = InkTime_v5
L5 = InkTime_v5; COPYRIGHT: Copyright (C) 2024 Ultra Librarian. All rights reserved.; MANUFACTURER_PART_NUMBER: 744043680; MFR_NAME: Wurth Electronics
L7 = InkTime_v5; DESCRIPTION: SMD / SMT Inductors (Coils), L=0.47?H, L x W x T :; HEIGHT: 1mm; JLCPCB: https://jlcpcb.com/partdetail/6763488-FTC252012SR47MBCA/C5832368; MANUFACTURER_NAME: TDK; MANUFACTURER_PART_NUMBER: FTC252012SR47MBCA
Q1 = InkTime_v5; PROD_ID: TRAN-14388
Q3 = InkTime_v5; AVAILABILITY: In Stock; CHECK_PRICES: https://www.snapeda.com/parts/SI1308EDL-T1-GE3/Vishay+Siliconix/view-part/?ref=eda; DESCRIPTION: Si1308EDL-T1-GE3 N-channel MOSFET Transistor, 1.5 A, 30 V, 3-Pin SC-70 | Siliconix / Vishay SI1308EDL-T1-GE3; MF: Vishay Siliconix; MP: SI1308EDL-T1-GE3; PACKAGE: SOT-323 Vishay Semiconductor; PRICE: None; PURCHASE-URL: https://www.snapeda.com/api/url_track_click_mouser/?unipart_id=274603&manufacturer=Vishay Siliconix&part_name=SI1308EDL-T1-GE3&search_term=None; SNAPEDA_LINK: https://www.snapeda.com/parts/SI1308EDL-T1-GE3/Vishay+Siliconix/view-part/?ref=snap
SW_DN SW_ENT SW_UP = InkTime_v5; COPYRIGHT: Copyright (C) 2025 Ultra Librarian. All rights reserved.; DIGI-KEY_PART_NUMBER_1: P123437TR-ND; DIGI-KEY_PART_NUMBER_2: P123437CT-ND; DIGI-KEY_PART_NUMBER_3: P123437DKR-ND; MANUFACTURER_NAME: Panasonic; MANUFACTURER_PART_NUMBER: EVP-AKE31A
U3 = InkTime_v5; AVAILABILITY: In Stock; CHECK_PRICES: https://www.snapeda.com/parts/MAX17048G+T10/Analog+Devices/view-part/?ref=eda; DESCRIPTION: 3µA 1-Cell/2-Cell Fuel Gauge with ModelGauge; MF: Analog Devices; MP: MAX17048G+T10; PACKAGE: TDFN-8 Maxim; PRICE: None; PURCHASE-URL: https://www.snapeda.com/api/url_track_click_mouser/?unipart_id=329239&manufacturer=Analog Devices&part_name=MAX17048G+T10&search_term=None; SNAPEDA_LINK: https://www.snapeda.com/parts/MAX17048G+T10/Analog+Devices/view-part/?ref=snap

## Nets
3V3: C6.2 C7.2 C8.2 C12.1 C14.2 C19.1 C25.1 C33.1 C34.2 IC2.C2 IC3.3 IC3.7 IC3.10 IC9.E2 IC9.E3 J2.1 Q1.2 R5.2 R7.2 R8.2 R17.1 R18.1 R_PWR_EPD.2 TP_3.3V.TP TP_3V3.TP U1.P$A22 U1.P$AD14 U1.P$AD23 U1.P$B1 U1.P$W1 U1.P$Y2
ALERT: U1.P$J24 U3.5
D+: D3.4 U1.P$AD6
D-: D3.6 U1.P$AD4
DEC1: C5.2 U1.P$C1
DEC3: C11.2 U1.P$D23
DEC4_6: C10.2 C15.1 C16.1 L3.1 U1.P$B5 U1.P$E24
DN: D3.1 J4.A7 J4.B7
DP: D3.3 J4.A6 J4.B6
EPD_3V3: C1-EP-DR.2 EPD_C5.2 J1.15 J1.16 L5.2 Q1.3
EPD_BUSY: J1.9 U1.P$AD12
EPD_CS: J1.12 U1.P$K2
EPD_DC: J1.11 U1.P$AD10
EPD_RST: J1.10 U1.P$AC11
GDR: J1.2 Q3.1 R2_EP_DR.2
GND: C1-EP-DR.1 C1.1 C2.2 C3.1 C4.1 C5.1 C6.1 C7.1 C8.1 C9.1 C10.1 C11.1 C12.2 C13.2 C14.1 C15.2 C16.2 C17.2 C18.2 C19.2 C20.1 C21.1 C22.1 C23.2 C24.1 C25.2 C27.1 C29.2 C30.2 C31.2 C32.2 C33.2 C34.1 C37.1 C38.1 C39.2 C42.2 C43.1 D3.2 D4.1 EPD_C1.1 EPD_C2.1 EPD_C5.1 EPD_C6.1 EPD_C7.1 EPD_C8.1 EPD_C9.1 EPD_C10.1 EPD_C11.1 EPD_C12.1 IC1.D2 IC2.B1 IC2.B3 IC3.8 IC3.9 IC9.B1 IC9.C1 IC9.C2 IC9.C3 J1.8 J1.17 J1.MP1 J1.MP2 J2.3 J2.5 J4.A1_B12 J4.A12_B1 J4.SH1 J4.SH2 J4.SH3 J4.SH4 R1_USB.1 R2_EP_DR.1 R2_USB1.2 R3.1 R9.1 R_TYPE_SEL.1 SJ1.1 SW_DN.1 SW_ENT.1 SW_UP.1 TP_BAT_GND.TP TP_GND.TP U1.P$74 U1.P$75 U1.P$76 U1.P$77 U1.P$78 U1.P$79 U1.P$80 U1.P$81 U1.P$82 U1.P$83 U1.P$84 U1.P$85 U1.P$86 U1.P$87 U1.P$88 U1.P$89 U1.P$90 U1.P$B7 U1.P$F23 U3.1 U3.4 U3.6 U3.9 X1.2 X1.4
HAPTIC_EN: IC2.A1 U1.P$U1
IMU_INT1: IC3.5 U1.P$N1
IMU_INT2: IC3.6 U1.P$P2
LX1: IC9.B2 L7.1
LX2: IC9.D2 IC9.D3 L7.2
MOSI: J1.14 U1.P$B13
N$1: C9.2 U1.P$N24
N$3: L2.2 U1.P$B3
N$4: IC1.D1 R9.2
N$5: IC9.D1 R4.2
N$6: C1.2 U1.P$B24 X1.1
N$7: IC9.E1 R2.2
N$8: C13.1 U1.P$A18
N$9: C3.2 L1.2 U1.P$H23
N$10: C2.1 U1.P$A23 X1.3
N$12: IC3.1 R3.2
N$13: C2-EP-DR.2 D2.1 D4.2
N$14: C2-EP-DR.1 D5.2 L5.1 Q3.3
N$15: L2.1 L3.2
N$18: R1_EP_DR.1 R_TYPE_SEL.2 SJ1.2
N$19: EPD_C2.2 J1.4
N$20: EPD_C1.2 J1.5
N$21: C20.2 U1.P$AC5
N$22: EPD_C6.2 J1.18
N$23: EPD_C7.2 J1.19
N$24: EPD_C8.2 J1.20
N$26: EPD_C10.2 J1.22
N$27: J4.B5 R2_USB1.1
N$28: EPD_C12.2 J1.24
N$30: C32.1 IC2.A2
N$31: J4.A5 R1_USB.2
OUT+: IC2.A3 TP_OP.TP
OUT-: IC2.C3 TP_ON.TP
P0.00: C17.1 U1.P$D2 X2.1
P0.01: C18.1 U1.P$F2 X2.2
P0.04: U1.P$J1
P0.09: U1.P$L24
P0.13: C30.1 R5.1 SW_UP.2 U1.P$AD8
P0.14: C31.1 R8.1 SW_ENT.2 U1.P$AC9
P0.19: U1.P$AC15
P0.20: U1.P$AD16
P0.21: U1.P$AC17
P0.22: U1.P$AD18
P0.23: U1.P$AC19
P0.24: U1.P$AD20
P0.25: U1.P$AC21
P0.26: U1.P$G1
P0.27: U1.P$H2
P0.28: U1.P$B11
P0.29: U1.P$A10
P0.30: U1.P$B9
P0.31: U1.P$A8
P1.01: Q1.1 R_PWR_EPD.1 U1.P$Y23
P1.02: C29.1 R7.1 SW_DN.2 U1.P$W24
P1.03: U1.P$V23
P1.04: U1.P$U24
P1.05: U1.P$T23
P1.06: U1.P$R24
P1.07: U1.P$P23
P1.09: U1.P$R1
P1.10: U1.P$A20
P1.11: U1.P$B19
P1.12: U1.P$B17
P1.13: U1.P$A16
P1.14: U1.P$B15
P1.15: U1.P$A14
PMIC_INT: IC1.A1 U1.P$T2
PREVGH: D5.1 EPD_C9.2 J1.21
PREVGL: D2.2 EPD_C11.2 J1.23
RESE: J1.3 Q3.2 R1_EP_DR.2
RESET: J2.6 TP_RESET.TP U1.P$AC13
RF: ANT1.1 C4.2 C22.2 L1.1
SCK: J1.13 U1.P$A12
SCL: IC1.B1 IC2.C1 IC3.12 R4.1 R17.2 TP_SCL.TP U1.P$M2 U3.7
SDA: IC1.C1 IC2.B2 IC3.2 R2.1 R18.2 TP_SDA.TP U1.P$L1 U3.8
SWDCLK: J2.4 TP_SWDCLK.TP U1.P$AA24
SWDIO: J2.2 TP_SWDIO.TP U1.P$AC24
SWO: TP_SWO.TP U1.P$AD22
VBAT: C27.2 C37.2 IC1.C2 TP_VBAT.TP U3.2 U3.3
VBUS: C21.2 C38.2 C42.1 C43.2 D3.5 IC1.A2 J4.A4_B9 J4.A9_B4 U1.P$AD2
VREG: C23.1 C24.2 C39.1 IC1.B2 IC9.A1 IC9.A2 IC9.A3 TP_VREG.TP

## Tracks (layer width: path | path; a pad name or v marks a point on that pad's centre or on a via)
3V3  (via drill 0.15, 0.25, 0.3)  (25 unrouted)
  Top 0.15: U1.P$AD23 C8.2 C7.2 24.94,13.29 U1.P$AD14 | v31.42,14.16 32.31,13.53 | v26.98,22.42 27.23,22.67 27.61,22.67 28.25,23.31 C12.1 | 20.63,23.56 20.88,22.42 U1.P$B1 | v18.47,24.2 C14.2 C6.2 | U1.P$Y2 U1.P$W1 v20.88,16.96 | v37.14,15.69 C19.1 | TP_3.3V.TP 21.01,7.31 v21.77,8.07
  Top 0.152: U1.P$A22 26.94,22.37
  Top 0.3: v27.87,14.42 26.72,13.28 C8.2 | C6.2 20.37,24.69 20.37,24.07 20.63,23.56
  Bottom 0.15: v27.87,14.42 v31.42,14.16
  other vias: 9.83,15.82
  pour Route15: -5.71,-5.44 53.82,-5.44 53.82,37.58 -5.71,37.58
ALERT  (1 unrouted)
D+  (1 unrouted)
D-  (1 unrouted)
DEC1
  Top 0.152: U1.P$C1 19.5,22.8 C5.2
DEC3
  Top 0.15: U1.P$D23 27.84,21.01 29,21.01 29.8,21.81 C11.2
DEC4_6  (via drill 0.35)
  Top 0.152: U1.P$B5 22.43,21.62 L3.1 23.53,24.54 23.79,24.54 C16.1 | 23.85,24.36 C16.1 | 25.22,24.46 C15.1 24.98,24.68 arc-90 24.47,25.18 | 23.96,24.68 C16.1 | 22.15,26.58 22.15,26.23 | 22.15,26.23 C10.2 | C16.1 22.15,26.23 | 24.47,25.18 24.47,25.55 arc-90 v25.14,26.23 | C16.1 arc-90 24.47,25.18 | v28.5,20.55 U1.P$E24
  Bottom 0.15: v28.5,20.55 28.5,21.15 28.39,21.26 28.39,21.61 28.64,21.86 28.68,21.86 28.93,22.12 28.93,22.47 28.68,22.72 26.93,22.72 25.14,24.51 v25.14,26.23
DN  (2 unrouted)
DP  (2 unrouted)
EPD_3V3  (via drill 0.25)  (2 unrouted)
  Top 0.3: EPD_C5.2 11.99,19.88 11.99,18.48 11.36,17.85 11.36,16.45 11.19,16.28 J1.15 | J1.15 J1.16 9.99,15.78 9.96,15.82 | J1.15 9.62,16.28 | L5.2 39.42,27.22 v39.42,28.01 39.12,28.01 C1-EP-DR.2 38.09,30.87 v37.01,31.95 37.01,32.65 Q1.3
  other vias: 9.45,16.32
EPD_BUSY  (1 unrouted)
EPD_CS  (via drill 0.2, 0.3)  (1 unrouted)
  Top 0.15: v9.32,17.85 J1.12
  Route15 0.15: v21.95,19.12 15.8,18.61 v9.32,17.85
EPD_DC  (1 unrouted)
EPD_RST  (1 unrouted)
GDR  (2 unrouted)
GND  (via drill 0.15, 0.25, 0.3)  (6 unrouted)
  Top 0.15: C11.1 31.54,22.04 32.59,22.04 v32.71,22.15 | v32.82,20.64 31.7,20.64 C3.1 | v32.56,17.85 C9.1 | v26.72,10.48 C8.1 | v25.33,10.48 C7.1 | v19.23,27.75 C14.1 | v19.99,27.5 C6.1 | v32.82,16.83 TP_GND.TP | R3.1 v32.82,16.83 | C19.2 v32.82,16.83 | C21.1 21.26,11.1 v21.26,10.35 21.4,10.35 C20.1
  Top 0.152: U1.P$B7 23.19,21.68 23.14,21.73 23.14,21.99 23.42,22.27 23.42,22.42 24.38,23.38 C15.2 | C13.2 v26.47,26.23 | C12.2 v27.99,26.23 | C10.1 v23.17,27.37 | C2.2 v29.64,26.61 | C1.1 v31.04,26.74
  Top 0.3: EPD_C9.1 EPD_C11.1 EPD_C12.1 14.16,9.61 v14.02,9.34 14.02,8.61 X1.4 | v9.32,15.31 9.35,15.28 J1.17
  pour Top: 1.23,-2.82 41.77,-2.82 47.02,2.43 47.02,33.57 43.07,37.52 -0.92,37.52 -0.92,-0.67
  pour Bottom: 47.12,-0.87 47.12,33.52 47.08,33.52 47.06,33.54 43.07,37.52 -0.97,37.52 -2.72,35.77 -2.72,-3.32 -2.64,-3.24 -2.62,-3.22 44.77,-3.22
  pour Route2: -5.71,-9.25 55.09,-9.25 55.09,37.58 -5.71,37.58
HAPTIC_EN  (1 unrouted)
IMU_INT1  (via drill 0.2)
  Top 0.15: U1.P$N1 v20.63,19.25 | v44.63,17.59 IC3.5
  Route15 0.15: v20.63,19.25 21.77,19.88 22.28,21.4 27.87,21.53 28.5,17.34 33.58,14.93 44.38,14.93 v44.63,17.59
IMU_INT2  (via drill 0.2)
  Top 0.15: v44.63,18.1 IC3.6
  Top 0.3: v21.9,18.1 v21.9,18.11 U1.P$P2
  Bottom 0.15: v44.63,18.1 45.65,18.74 45.14,20.26 33.33,20.26 32.69,18.48 28.88,18.48 28.25,17.47 27.61,16.07 22.28,16.07 22.28,17.85 v21.9,18.1
LX1  (1 unrouted)
LX2  (2 unrouted)
MOSI  (via drill 0.25)
  Top 0.15: v9.96,16.83 10.01,16.78 J1.14
  Top 0.3: U1.P$B13 v24.69,21.4
  Route2 0.15: v24.69,21.4 23.55,22.55 v20.37,22.55 | v15.67,20.77 15.17,20.26 11.74,20.26 11.1,19.63 11.1,17.97 v9.96,16.83
  Route15 0.15: 16.05,22.55 v20.37,22.55 15.93,22.55 15.67,22.29 v15.67,20.77
N$1
  Top 0.15: C9.2 U1.P$N24
N$3
  Top 0.152: 21.3,23.99 21.25,23.94 L2.2 21.25,22.3 U1.P$B3
N$4  (1 unrouted)
N$5  (1 unrouted)
N$6  (via drill 0.3)  (1 unrouted)
  Top 0.15: U1.P$B24 28.41,21.36 28.49,21.44 v28.82,21.44
  Top 0.152: v31.42,23.05 C1.2 | v12.12,6.8 X1.1
  Bottom 0.15: v31.42,23.05 29.97,21.6 28.99,21.6 v28.82,21.44
N$7  (1 unrouted)
N$8
  Top 0.152: U1.P$A18 25.94,22.71 C13.1
N$9
  Top 0.15: C3.2 30.03,20.29 L1.2 29.62,19.66 27.82,19.66 27.76,19.61 U1.P$H23
N$10  (via drill 0.3)
  Top 0.152: U1.P$A23 28,22.42 28.26,22.42 | 28.26,22.42 C2.1 | 28.26,22.42 28.38,22.3 v28.5,22.29 | v16.31,8.2 X1.3
  Bottom 0.15: v28.5,22.29 27.74,21.79 20.5,21.79 19.99,17.21 19.86,16.45 17.2,15.69 v16.31,8.2
N$12  (1 unrouted)
N$13  (2 unrouted)
N$14  (3 unrouted)
N$15
  Top 0.152: L2.1 L3.2
N$18  (2 unrouted)
N$19
  Top 0.15: EPD_C2.2 11.97,21.78 J1.4
N$20
  Top 0.15: EPD_C1.2 13,21.28 J1.5
N$21
  Top 0.15: U1.P$AC5 22.65,15.82 21.52,15.82 21.39,15.69 21.39,14.18 C20.2
N$22  (via drill 0.25)
  Top 0.15: v9.83,14.8 10.71,14.8 J1.18 | EPD_C6.2 12.75,18.48 v11.99,17.72
  Bottom 0.15: v11.99,17.72 11.99,17.34 11.48,16.83 11.48,16.2 10.97,15.69 10.97,14.67 9.96,14.67 v9.83,14.8
N$23  (via drill 0.25)
  Top 0.15: v9.45,14.29 10.71,14.29 J1.19 | EPD_C7.2 12.74,16.7 v11.99,16.7
  Route15 0.15: v11.99,16.7 11.99,16.07 11.23,16.07 v9.45,14.29
  Bottom 0.15: v11.99,16.7 11.99,16.2 11.48,15.69 11.48,14.29 v9.45,14.29
N$24  (via drill 0.25)
  Top 0.15: v9.96,13.78 | v9.96,13.78 J1.20 | EPD_C8.2 12.24,15.82 v11.99,15.56
  Bottom 0.15: v11.99,15.56 11.99,14.04 11.74,13.78 v9.96,13.78
N$26
  Top 0.15: J1.22 10.74,12.77 11.99,12.77 12.5,13.28 EPD_C10.2 12.86,13.64
N$27  (1 unrouted)
N$28
  Top 0.15: EPD_C12.2 11.77,10.74 J1.24
N$30  (1 unrouted)
N$31  (1 unrouted)
OUT+  (1 unrouted)
OUT-  (1 unrouted)
P0.00
  Top 0.15: 20.82,21.09 21.14,20.77 21.14,20.73 21.32,20.56 21.57,20.56 21.62,20.61 U1.P$D2 | 20.82,21.09 19.62,21.14 | 20.82,21.09 19.61,19.88 X2.1
  Top 0.152: 19.62,21.14 arc45 C17.1
P0.01
  Top 0.15: U1.P$F2 21.62,20.11 21.57,20.16 21.32,20.16 21.03,19.88 20.75,20.01 X2.2 C18.1
P0.13  (3 unrouted)
P0.14  (via drill 0.15)  (3 unrouted)
  Top 0.15: U1.P$AC9 23.52,15.69 v23.17,15.69
  Route15 0.15: v23.17,15.69 23.17,6.54 v21.64,5.02
P1.01  (via drill 0.3)  (2 unrouted)
  Top 0.15: v39.04,31.06 39.04,31.63 Q1.1
  Route2 0.15: v27.48,16.58 29.14,18.48 32.31,18.48 33.58,20.39 36.63,20.39 39.93,21.4 v39.04,31.06
P1.02  (via drill 0.3)  (1 unrouted)
  Top 0.15: 28.75,16.7 U1.P$W24 | SW_DN.2 v32.44,5.15 32.72,4.86 33.58,4.86 37.39,4.64 R7.1 C29.1
  Bottom 0.15: v28.88,16.7 29.77,14.8 32.31,14.8 32.44,14.67 v32.44,5.15
PMIC_INT  (via drill 0.2)  (1 unrouted)
  Top 0.15: v7.04,31.18 IC1.A1
  Route2 0.15: v21.9,17.59 21.06,18.74 | 20.88,18.99 21.06,18.74 | 21.06,18.74 19.86,20.64 16.18,20.64 15.42,25.09 10.85,26.61 9.32,31.18 v7.04,31.18
PREVGH  (1 unrouted)
  Top 0.15: J1.21 11.87,13.28 13.12,14.53 EPD_C9.2
PREVGL  (1 unrouted)
  Top 0.15: J1.23 10.75,12.26 12.12,12.26 12.24,12.13 EPD_C11.2
RESE  (2 unrouted)
RESET  (2 unrouted)
RF  (via drill 0.3)  (1 unrouted)
  Top 0.15: v32.06,19.37 31.16,19.37 L1.1 | v11.36,6.67 10.49,6.67 C22.2 10.31,6.86 C4.2 8.11,5.91 ANT1.1
SCK  (via drill 0.3)
  Top 0.15: v9.7,17.34 J1.13 | U1.P$A12 v24.56,22.29
  Bottom 0.15: v9.7,17.34 12.24,18.74 15.42,18.74 v15.8,19.88 16.94,22.29 v24.56,22.29
SCL  (via drill 0.15, 0.2, 0.3)  (6 unrouted)
  Top 0.15: v41.71,17.97 IC3.12 39.93,17.34 39.93,16.07 v40.06,15.31
  Top 0.3: v21.91,18.61 U1.P$M2
  Route15 0.15: v40.06,15.31 38.91,15.31 37.77,16.45 33.96,16.45 33.45,16.96 29.9,16.96 28.88,17.97 28.88,21.66 27.99,22.55 21.13,22.55 15.8,27.88 15.8,32.58 v15.17,33.22
  Bottom 0.15: v41.71,17.97 v40.06,15.31 38.66,15.43 37.77,17.21 28.5,17.21 28.37,14.93 20.12,14.93 20.63,18.61 v21.91,18.61
SDA  (via drill 0.15)  (3 unrouted)
  Top 0.15: U1.P$L1 21.35,18.98 v21.01,19.5 | v15.17,33.98 U3.8 | v6.4,28.9 IC1.C1 | v39.55,20.64 R18.2 41.2,21.15 | TP_SDA.TP v42.22,19.88 | v42.85,16.58 IC3.2
  Route2 0.15: v21.01,19.5 20.12,20.9 16.56,20.9 v15.17,33.98 | v15.17,33.98 7.93,34.1 7.16,34.1 v6.4,28.9 | v33.2,25.21 31.68,27.12 16.44,27.5 v15.17,33.98
  Bottom 0.15: v39.55,20.64 33.45,20.64 v33.2,25.21 | v42.22,19.88 44.76,19.88 45.14,18.74 44.38,18.48 v42.85,16.58
SWDCLK  (via drill 0.3)
  Top 0.15: 40.46,9 40.67,9 | v29.77,16.07 U1.P$AA24 | v41.2,8.32 J2.4 40.46,9 | 40.46,9 arc-45 41.2,7.21 41.2,4.64 42.47,4.64 42.47,4.49 arc45 TP_SWDCLK.TP
  Bottom 0.15: v29.77,16.07 32.31,16.07 | 32.31,16.07 32.4,16.07 | 32.31,16.07 34.34,14.16 41.71,14.16 41.2,12.26 v41.2,8.32
SWDIO  (1 unrouted)
  Top 0.15: 29.77,9.72 38.65,9.72 38.73,9.8 40.49,9.8 40.58,9.72 J2.2 | U1.P$AC24 28.15,15.65 28.92,15.65 29.77,14.8 30.66,13.78 30.73,10.68 TP_SWDIO.TP
SWO  (1 unrouted)
  Top 0.15: U1.P$AD22 27.02,15.37 27.32,15.66 27.57,15.66 27.86,15.37 28.5,15.37 28.5,13.53
VBAT  (5 unrouted)
VBUS  (8 unrouted)
VREG  (7 unrouted)
(copper drawn outside any net)
  shapes: Bottom area x2, Route15 area x1, Route2 area x1, Top area x1